# Altium PCB BMS Sense Board.PcbDoc
Units mil, origin at the board's own origin, x right, y up, seen from the top; angles counter-clockwise.
Board outline 4845 x 2615 mil, 2 copper layers (Top Layer, Bottom Layer); 39 components, 36 nets, 76 pads, 4 vias.
Unrouted connection lines stored in the file: 10.
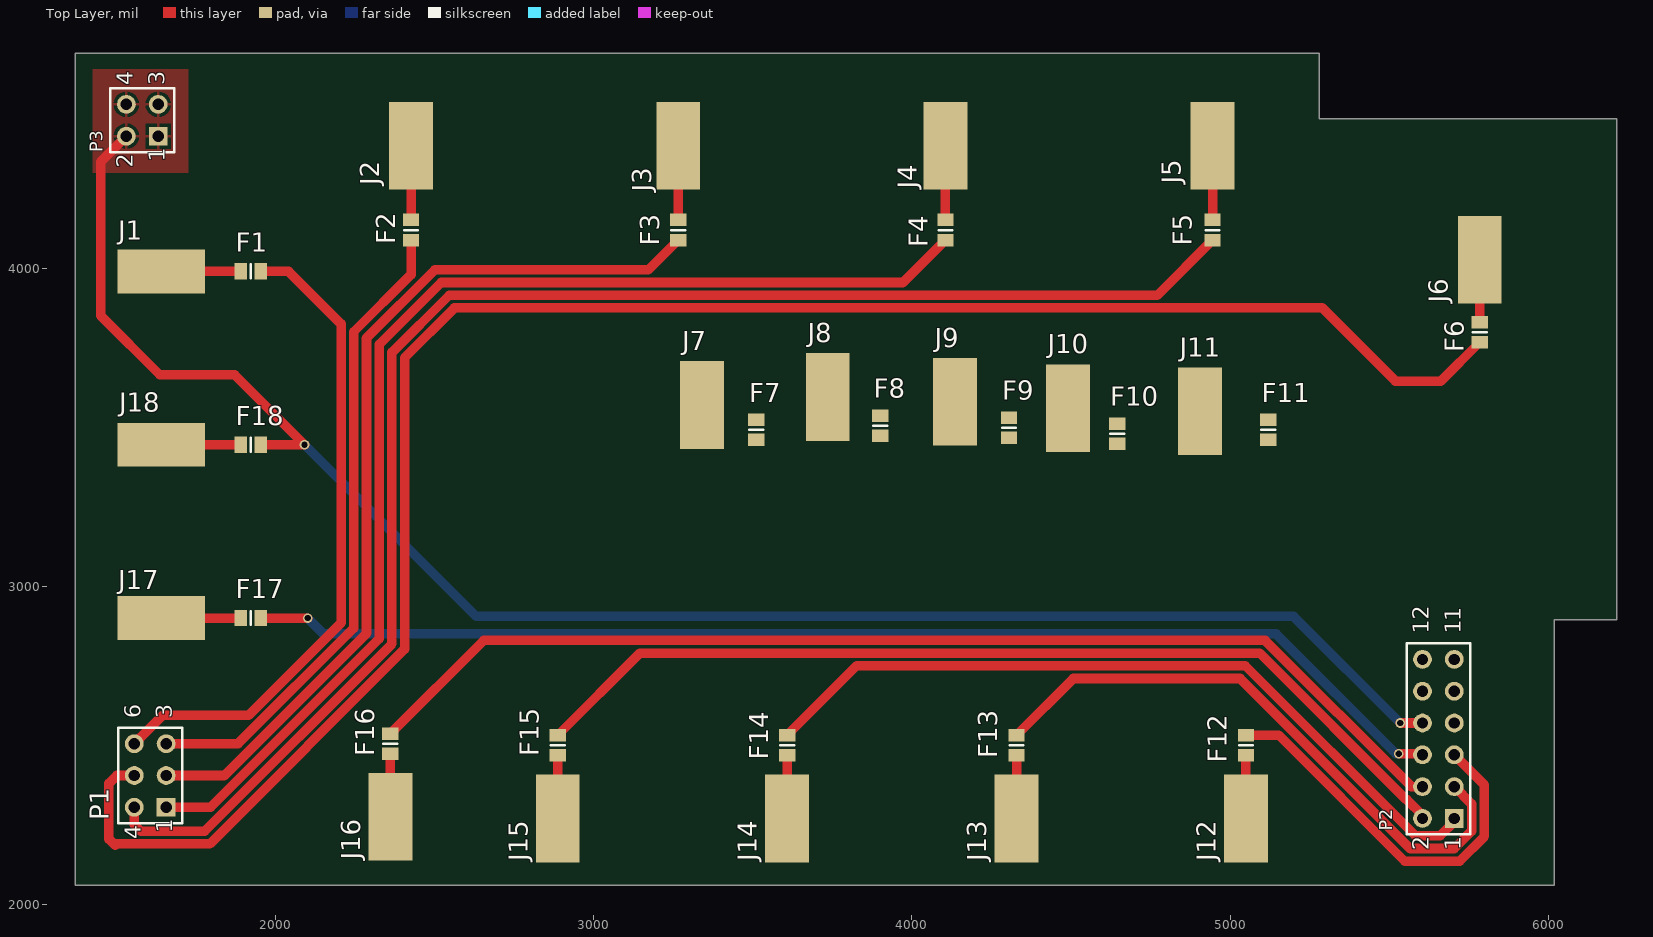
[diagram p0: Top Layer view]
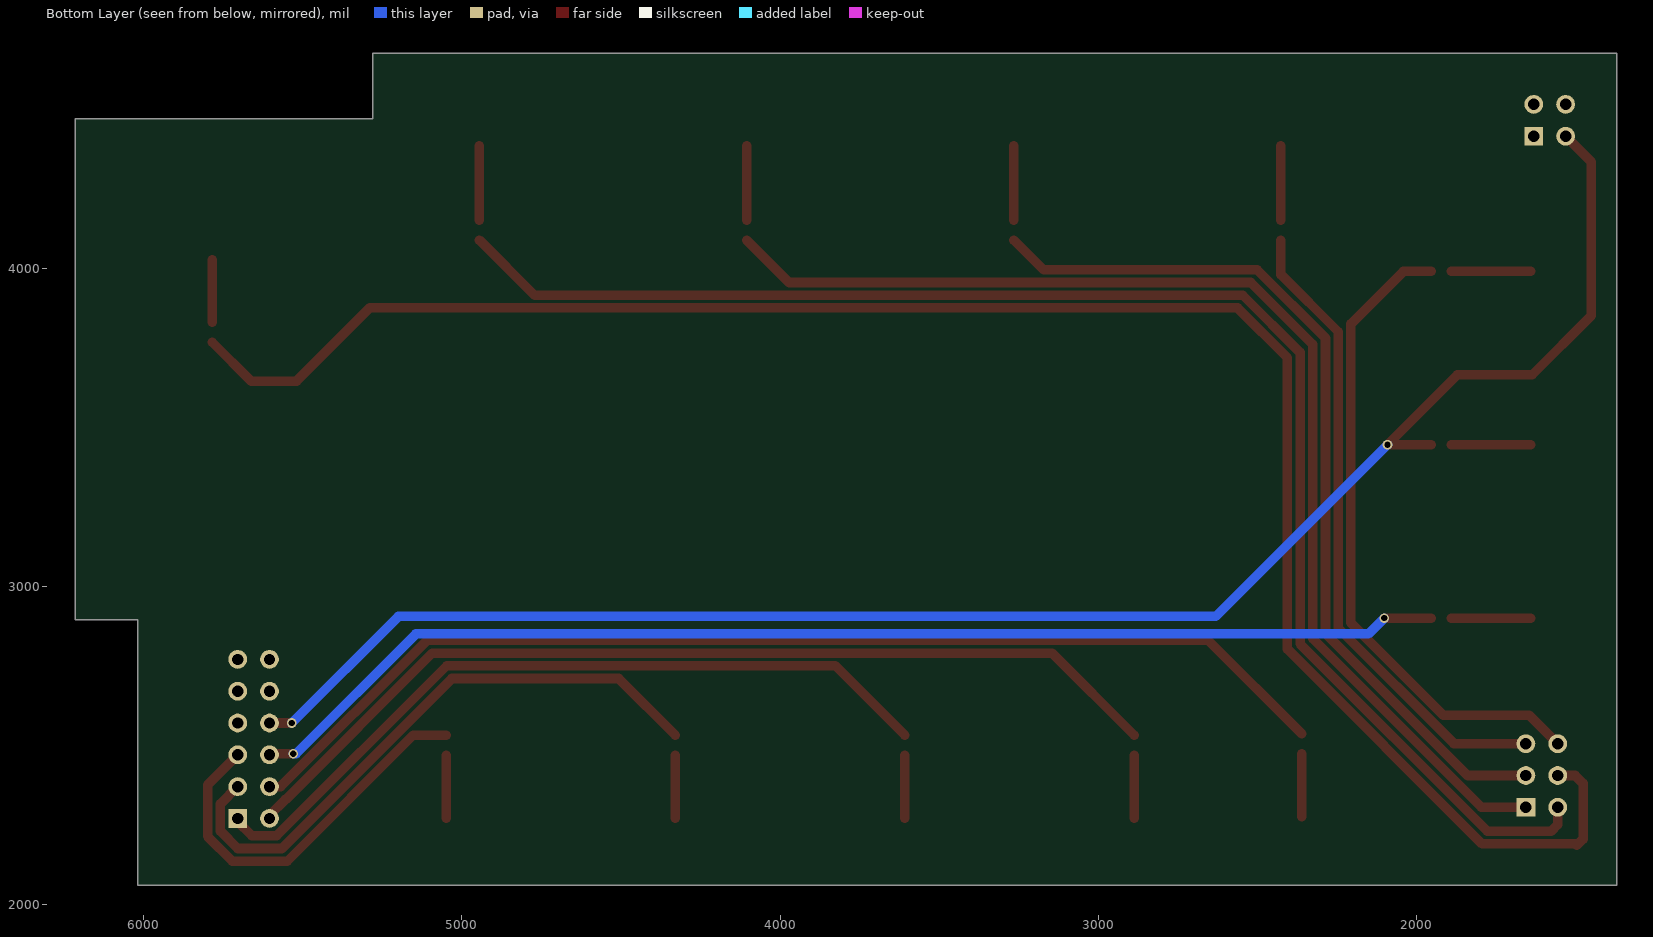
[diagram p1: Bottom Layer view, seen from below]

## Layer stack, top to bottom
Top Solder: solder mask 0.4, Solder Resist, Dk 3.5
Top Layer: signal copper 1.4
Dielectric 1: dielectric 12.6, FR-4, Dk 4.8
Bottom Layer: signal copper 1.4
Bottom Solder: solder mask 0.4, Solder Resist, Dk 3.5

## Board outline
1370,2060 1370,4675 5280,4675 5280,4470 6215,4470 6215,2895 6020,2895 6020,2060

## Design rules (kind name [scope] priority, off if disabled: settings)
Clearance [All] p1: gap=10 ignorepadtopadclearanceinfootprint=FALSE except(0: Arc-Hole Track-Hole SMDPad-Hole THPad-Hole Via-Hole Fill-Hole Poly-Hole Region-Hole Text-Hole)
PolygonConnect [All] p1: connectstyle=Relief reliefconductorwidth=10 reliefentries=4 polygonreliefangle="90 Angle" airgapwidth=10
RoutingVias [All] p1: holewidth=28 width=50 viastyle="Through Hole" minholewidth=28 minwidth=50 maxholewidth=28 maxwidth=50
SolderMaskExpansion [All] p1: expansion=4
Width [All] p1: maxlimit=30 minlimit=10 preferedwidth=30 toplayer_minwidth=30 bottomlayer_maxwidth=10 bottomlayer_prefwidth=10 minimp=50.000000 maximp=50.000000 favimp=50.000000
30 further rules are at their usual default settings.

## Components (designator, comment, footprint, x,y, rotation, side; value= is the part's Value field where it differs from the comment)
F1 "Fuse 2" 6-0805_L 1921.5,3990 r180 top
F2 "Fuse 2" 6-0805_L 2425,4120 r90 top
F3 "Fuse 2" 6-0805_L 3265,4120 r90 top
F4 "Fuse 2" 6-0805_L 4105,4120 r90 top
F5 "Fuse 2" 6-0805_L 4945,4120 r90 top
F6 "Fuse 2" 6-0805_L 5785,3798.5 r90 top
F7 "Fuse 2" 6-0805_L 3510,3491.5 r90 top
F8 "Fuse 2" 6-0805_L 3900,3505 r90 top
F9 "Fuse 2" 6-0805_L 4305,3498.5 r90 top
F10 "Fuse 2" 6-0805_L 4645,3480 r90 top
F11 "Fuse 2" 6-0805_L 5120,3491.5 r90 top
F12 "Fuse 2" 6-0805_L 5050,2500 r270 top
F13 "Fuse 2" 6-0805_L 4328.75,2500 r270 top
F14 "Fuse 2" 6-0805_L 3607.5,2500 r270 top
F15 "Fuse 2" 6-0805_L 2886.25,2500 r270 top
F16 "Fuse 2" 6-0805_L 2360,2505 r270 top
F17 "Fuse 2" 6-0805_L 1921.5,2900 r180 top
F18 "Fuse 2" 6-0805_L 1921.5,3445 r180 top
J1 "V12" PAD 1640,3990 r90 top
J2 "V11" PAD 2425,4385 r0 top
J3 "V10" PAD 3265,4385 r0 top
J4 "V9" PAD 4105,4385 r0 top
J5 "V8" PAD 4945,4385 r0 top
J6 "V7" PAD 5785,4026.58 r0 top
J7 "TEMP1" PAD 3340,3570 r0 top
J8 "TEMP2" PAD 3735,3595 r180 top
J9 "TEMP3" PAD 4135,3580 r0 top
J10 "TEMP4" PAD 4490,3560 r180 top
J11 "TEMP5" PAD 4905,3550 r180 top
J12 "V6" PAD 5050,2270 r180 top
J13 "V5" PAD 4328.75,2270 r180 top
J14 "V4" PAD 3607.5,2270 r0 top
J15 "V3" PAD 2886.25,2270 r0 top
J16 "V2" PAD 2360,2275 r0 top
J17 "V1" PAD 1640,2900 r270 top
J18 "V0" PAD 1640,3445 r270 top
P1 "Header 6" HDR2X3_CEN 1655,2305 r90 top
P2 "Header 12" HDR2X6 5705,2270 r90 top
P3 "Header 4" HDR2X2 1630,4415 r90 top

## Footprints (in the part's own frame and the unit in brackets; to place one, negate y for a bottom-side part, rotate by r counter-clockwise, add the part's x,y. Pads: shape width x height; smd on the part's side, far side on the other; paste and mask are expansions set on the pad)
6-0805_L [mm] "Chip Resistor, Body 2.0x1.2mm, IPC High Density"
  rect 1x1.3 smd: 1(-0.8,0) 2(0.8,0)
  silkscreen extent 0,-0.55 0,0.55, body extent -1.07,-0.7 1.07,0.7, height 0.7
HDR2X2 [mm] "Connector; Header; 2x2 Position"
  rect 1.5x1.5 hole 0.9: 1(0,0)
  round 1.5 hole 0.9: 2(0,2.54) 3(2.54,0) 4(2.54,2.54)
  silkscreen extent -1.27,-1.27 3.81,3.81
HDR2X3_CEN [mm] "Connector; Header; 3x2 Position"
  rect 1.5x1.5 hole 0.9: 1(0,0)
  round 1.5 hole 0.9: 2(2.54,0) 3(5.08,0) 4(0,2.54) 5(2.54,2.54) 6(5.08,2.54)
  silkscreen extent -1.27,-1.27 6.35,3.81
HDR2X6 [mm] "Connector; Header; 6x2 Position"
  rect 1.5x1.5 hole 0.9: 1(0,0)
  round 1.5 hole 0.9: 2(0,2.54) 3(2.54,0) 4(2.54,2.54) 5(5.08,0) 6(5.08,2.54) 7(7.62,0) 8(7.62,2.54) 9(10.16,0) 10(10.16,2.54) 11(12.7,0) 12(12.7,2.54)
  silkscreen extent -1.27,-1.27 13.97,3.81
PAD [mm]
  rect 3.5x7 smd: 1(0,0)

## Part data
F1 F2 F3 F4 F5 F6 F7 F8 F9 F10 F11 F12 F13 F14 F15 F16 F17 F18: "Fuse", LatestRevisionDate=17-Jul-2002, LatestRevisionNote="Re-released for DXP Platform.", PackageDescription="Thru-Hole; 2 Leads", PackageReference=PIN-W2/E2.8, Published=8-Jun-2000, Publisher="Altium Limited"
J1 J2 J3 J4 J5 J6 J7 J8 J9 J10 J11 J12 J13 J14 J15 J16 J17 J18: library part Socket, "Socket", LatestRevisionDate=17-Jul-2002, LatestRevisionNote="Re-released for DXP Platform.", Publisher="Altium Limited"
P1: "Header, 6-Pin", LatestRevisionDate=17-Jul-2002, LatestRevisionNote="Re-released for DXP Platform.", Publisher="Altium Limited"
P2: "Header, 12-Pin", LatestRevisionDate=17-Jul-2002, LatestRevisionNote="Re-released for DXP Platform.", Publisher="Altium Limited"
P3: "Header, 4-Pin", LatestRevisionDate=17-Jul-2002, LatestRevisionNote="Re-released for DXP Platform.", Publisher="Altium Limited"

## Via types
v1: diameter 30, hole 20, Top Layer to Bottom Layer, 4 vias

## Nets (pads, with @x,y where several pads share a name; then routed paths per layer and width w, separated by ;. In a path a pad name is that pad's centre, name@x,y a point inside that pad or via, vN(x,y) a via of type N, cw(c..) or ccw(c..) an arc to the next point about the centre after c; other vN are vias at no path point)
NetF1_2: F1.2 J1.1 | length 250
  Top Layer w30: J1.1 F1.2
NetF2_2: F2.2 J2.1 | length 233.5
  Top Layer w30: F2.2 J2.1
NetF3_2: F3.2 J3.1 | length 233.5
  Top Layer w30: F3.2 J3.1
NetF4_2: F4.2 J4.1 | length 233.5
  Top Layer w30: F4.2 J4.1
NetF5_2: F5.2 J5.1 | length 233.5
  Top Layer w30: F5.2 J5.1
NetF6_2: F6.2 J6.1 | length 196.6
  Top Layer w30: F6.2 J6.1
NetF7_2: F7.2 J7.1
NetF8_2: F8.2 J8.1
NetF9_2: F9.2 J9.1
NetF10_2: F10.2 J10.1
NetF11_2: F11.2 J11.1
NetF12_2: F12.2 J12.1 | length 198.5
  Top Layer w30: J12.1 F12.2
NetF13_2: F13.2 J13.1 | length 198.5
  Top Layer w30: J13.1 F13.2
NetF14_2: F14.2 J14.1 | length 198.5
  Top Layer w30: J14.1 F14.2
NetF15_2: F15.2 J15.1 | length 198.5
  Top Layer w30: J15.1 F15.2
NetF16_2: F16.2 J16.1 | length 198.5
  Top Layer w30: J16.1 F16.2
NetF17_2: F17.2 J17.1 | length 250
  Top Layer w30: J17.1 F17.2
NetF18_2: F18.2 J18.1 | length 250
  Top Layer w30: J18.1 F18.2
TEMP1: F7.1 P2.10
TEMP2: F8.1 P2.12
TEMP3: F9.1 P2.11
TEMP4: F10.1 P2.9
TEMP5: F11.1 P2.7
V0: F18.1 P2.8 P3.1 P3.2 P3.3 P3.4 | length 5420.3
  Top Layer w30: P3.2 1450,4335 1450,3850 1635,3665 1870,3665 v1(2090,3445) F18.1 ; v1(5535,2570) P2.8
  Bottom Layer w30: v1(2090,3445) 2630,2905 5200,2905 v1(5535,2570)
V1: F17.1 P2.6 | length 3830.1
  Top Layer w30: F17.1 v1(2100,2900) ; v1(5530,2473.5) 5601.5,2473.5 P2.6
  Bottom Layer w30: v1(2100,2900) 2150,2850 5145,2850 5521.5,2473.5 v1(5530,2473.5)
V2: F16.1 P2.4 | length 3557.1
  Top Layer w30: F16.1 2653.5,2830 5110,2830 5570,2370 P2.4
V3: F15.1 P2.2 | length 3047.1
  Top Layer w30: F15.1 3144.75,2790 5093.43,2790 5553.43,2330 5555,2330 5605,2280 P2.2
V4: F14.1 P2.1 | length 2437.6
  Top Layer w30: F14.1 3826,2750 5047.89,2750 5582.41,2215.47 5660,2215.47 5705,2260.47 P2.1
V5: F13.1 P2.3 | length 1911.2
  Top Layer w30: F13.1 4507.25,2710 5031.32,2710 5565.85,2175.47 5704.88,2175.47 5759.53,2230.12 5759.53,2315.47 P2.3
V6: F12.1 P2.5 | length 1241.5
  Top Layer w30: F12.1 5153.25,2531.5 5549.28,2135.47 5721.45,2135.47 5799.53,2213.55 5799.53,2375.47 P2.5
V7: F6.1 P1.5 | length 5966.2
  Top Layer w30: P1.5 1500,2405 1475,2380 1475,2205 1495,2185 1500,2190 1792.84,2190 2405,2802.16 2405,3718.43 2561.57,3875 5290,3875 5520,3645 5662.99,3645 F6.1
V8: F5.1 P1.4 | length 4759.8
  Top Layer w30: P1.4 1555,2250 1575,2230 1776.27,2230 2365,2818.73 2365,3735 2545,3915 4771.5,3915 F5.1
V9: F4.1 P1.1 | length 3730.4
  Top Layer w30: P1.1 1794.71,2305 2325,2835.29 2325,3760 2520,3955 3971.5,3955 F4.1
V10: F3.1 P1.2 | length 2851
  Top Layer w30: P1.2 1838.14,2405 2285,2851.86 2285,3780 2500,3995 3171.5,3995 F3.1
V11: F2.1 P1.3 | length 2035.2
  Top Layer w30: P1.3 1881.57,2505 2245,2868.43 2245,3800 2425,3980 F2.1
V12: F1.1 P1.6 | length 2067.8
  Top Layer w30: P1.6 1645,2595 1915,2595 2205,2885 2205,3825 2040,3990 F1.1

## Polygon pours and split planes (outlines as drawn)
V0 on Top Layer "Top Layer-V0" (solid, pour order 2): 1425,4300 1725,4300 1725,4625 1425,4625
no net on Top Layer "Top Layer-No Net" (solid, pour order 0): 1450,4325

## Silkscreen, mask and mechanical layers (free items; w line width, h text height)
Mechanical 1:
  the board outline again, w10

## Dimensions
1530,4515 to 1370,4675 on Mechanical 1
1530,4515 to 1370,4675 on Mechanical 1
5705,2270 to 6020,2060 on Mechanical 13
5705,2270 to 6020,2060 on Mechanical 13
1555,2305 to 1370,2060 on Mechanical 13
1555,2305 to 1370,2060 on Mechanical 13

## Text inside footprints (layer, text, board x,y; h text height)
P1: Top Overlay "4" at 1575,2205 h50 r90; Top Overlay "1" at 1675,2225 h50 r90; Top Overlay "3" at 1675,2585 h50 r90; Top Overlay "6" at 1575,2585 h50 r90
P2: Top Overlay "12" at 5625,2850 h50 r90; Top Overlay "1" at 5725,2890 h50 r90; Top Overlay "1" at 5725,2850 h50 r90; Top Overlay "1" at 5725,2170 h50 r90; Top Overlay "2" at 5625,2170 h50 r90
P3: Top Overlay "1" at 1650,4335 h50 r90; Top Overlay "2" at 1550,4315 h50 r90; Top Overlay "4" at 1550,4575 h50 r90; Top Overlay "3" at 1650,4575 h50 r90